# EAGLE board cry (EAGLE 9.5.2)
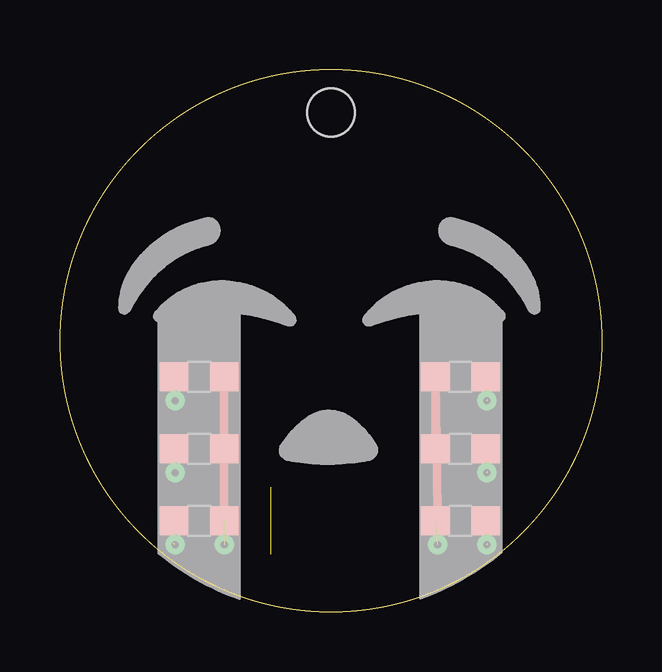
[diagram p0: board, top side]
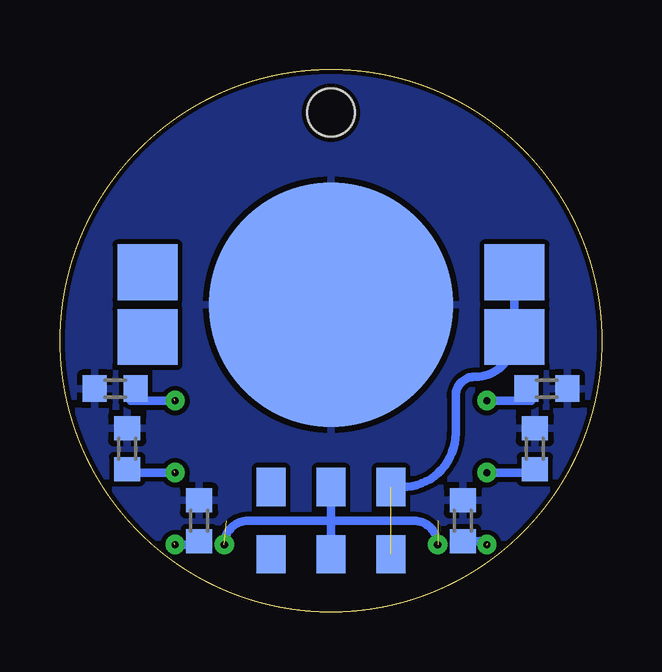
[diagram p1: board, bottom side, seen from below]

Size 22.6 x 22.6 mm. Coordinates in mm from the lower left corner, seen from the top.
Outline: circle at 11.3,11.3 radius 11.3
Copper layers (1*16): Top 0.035mm / dielectric 1.5mm / Bottom 0.035mm
Design rules "SparkFun *": minimum track width 8mil, minimum drill 20mil, track to track 8mil, track to pad 8mil, pad to pad 8mil, via to via 8mil, smd to smd 8mil, copper to edge 8mil, drill to drill 8mil, minimum pad ring 12mil, minimum via ring 10mil, stop-mask expansion 4mil, vias tented up to drill 0.4mm, thermal gap 10mil
Holes 2 mm at 11.3,20.8

## Footprints (pad centres in the part's own frame; a part is rotated, then mirrored left to right if it is on the bottom)
CHIP-LED0805 = smd 1.2 x 1.2: A 0,-1.05; C 0,1.05
R0603 = smd 1 x 1.1: 1 -0.85,0; 2 0.85,0
CL-SB-22A-02T-DPDT-COMPACT-SWITCH = smd 1.2 x 1.6: P$1 -2.5,-1.4; P$2 0,-1.4; P$3 2.5,-1.4; P$4 -2.5,1.4; P$5 0,1.4; P$6 2.5,1.4
BATHLD012SMT = smd 2.5 x 2.325: 1 -7.65,1.35; 2 7.65,1.35; P$2 -7.65,-1.35; P$3 7.65,-1.35 | smd 10.2 x 10.2: P$1 0,0

## Placement (x,y rotation side)
LED1  [CHIP-LED0805]  5.8,9.8 90 top
LED2  [CHIP-LED0805]  16.7,9.8 270 top
LED3  [CHIP-LED0805]  5.8,6.8 90 top
LED4  [CHIP-LED0805]  16.7,6.8 270 top
LED5  [CHIP-LED0805]  5.8,3.8 90 top
LED6  [CHIP-LED0805]  16.7,3.8 270 top
R1  [R0603]  2.8,6.8 90 bottom
R2  [R0603]  2.3,9.3 0 bottom
R3  [R0603]  20.3,9.3 180 bottom
R4  [R0603]  19.8,6.8 90 bottom
R5  [R0603]  5.8,3.8 90 bottom
R6  [R0603]  16.8,3.8 90 bottom
U$1  CL-SB-22A-02T-SLIDE-SWITCH-TUCKED-PADS  [CL-SB-22A-02T-DPDT-COMPACT-SWITCH]  11.3,3.8 180 bottom
VBAT  BAT-HLD-012-SMT  [BATHLD012SMT]  11.3,12.8 0 bottom

## Library data of the parts
LED1-LED6 = led
R1-R6 = rcl; SPICEPREFIX: R
U$1 = electroninks
VBAT = SamacSys_Parts; DESCRIPTION: Coin Cell Battery Holders Bat Hld CR1216/1225 Surface Mount; HEIGHT: 3mm; MANUFACTURER_NAME: Linx Technologies; MANUFACTURER_PART_NUMBER: BAT-HLD-012-SMT; MOUSER_PART_NUMBER: 712-BAT-HLD-012-SMT; MOUSER_PRICE-STOCK: https://www.mouser.com/Search/Refine.aspx?Keyword=712-BAT-HLD-012-SMT

## Nets
GND: R1.2 R2.2 R3.2 R4.2 R5.2 R6.2 VBAT.P$1
N$1: LED1.C R2.1
N$2: LED3.C R1.1
N$3: LED2.C R3.1
N$4: LED4.C R4.1
N$5: LED5.C R5.1
N$6: LED6.C R6.1
VBAT: U$1.P$1 U$1.P$4 VBAT.2
VCC: LED1.A LED2.A LED3.A LED4.A LED5.A LED6.A U$1.P$2 U$1.P$5

## Tracks (layer width: path | path; a pad name or v marks a point on that pad's centre or on a via)
GND
  pour Bottom: -1.6,23.9 23.84,23.9 23.84,-1.2 -1.6,-1.2
N$1  (via drill 0.3)
  Top 0.35: LED1.C 4.8,9.75 v4.8,8.8
  Bottom 0.35: R2.1 arc90 2.95,8.8 v4.8,8.8
N$2  (via drill 0.3)
  Top 0.35: LED3.C 4.8,6.75 v4.8,5.8
  Bottom 0.35: v4.8,5.8 2.95,5.8 R1.1
N$3  (via drill 0.3)  (1 unrouted)
  Top 0.35: LED2.C 17.85,8.85
  Bottom 0.35: R3.1 arc-90 19.65,8.8 v17.8,8.8
N$4  (via drill 0.3)  (1 unrouted)
  Top 0.35: LED4.C 17.85,5.85
  Bottom 0.35: v17.8,5.8 19.65,5.8 R4.1
N$5  (via drill 0.3)  (1 unrouted)
  Top 0.35: LED5.C 4.75,2.85
  Bottom 0.35: v4.8,2.8 4.95,2.95 R5.1
N$6  (via drill 0.3)  (1 unrouted)
  Top 0.35: LED6.C 17.85,2.85
  Bottom 0.35: v17.8,2.8 16.95,2.8 R6.1
VBAT  (1 unrouted)
  Bottom 0.35: VBAT.2 3.65,11.45 arc90 5.3,9.8 arc-90 6.1,9 6.1,7.44 arc90 8.34,5.2 U$1.P$1
VCC  (via drill 0.3)  (2 unrouted)
  Top 0.35: v6.85,2.8 LED1.A LED3.A | v15.75,2.8 LED2.A LED4.A
  Bottom 0.35: U$1.P$5 11.3,3.8 | 11.3,3.8 U$1.P$2 | 11.3,3.8 7.85,3.8 arc90 v6.85,2.8 | v15.75,2.8 arc90 14.75,3.8 11.3,3.8